# EAGLE board Croduino Basic v1.2 (EAGLE 7.3.0)
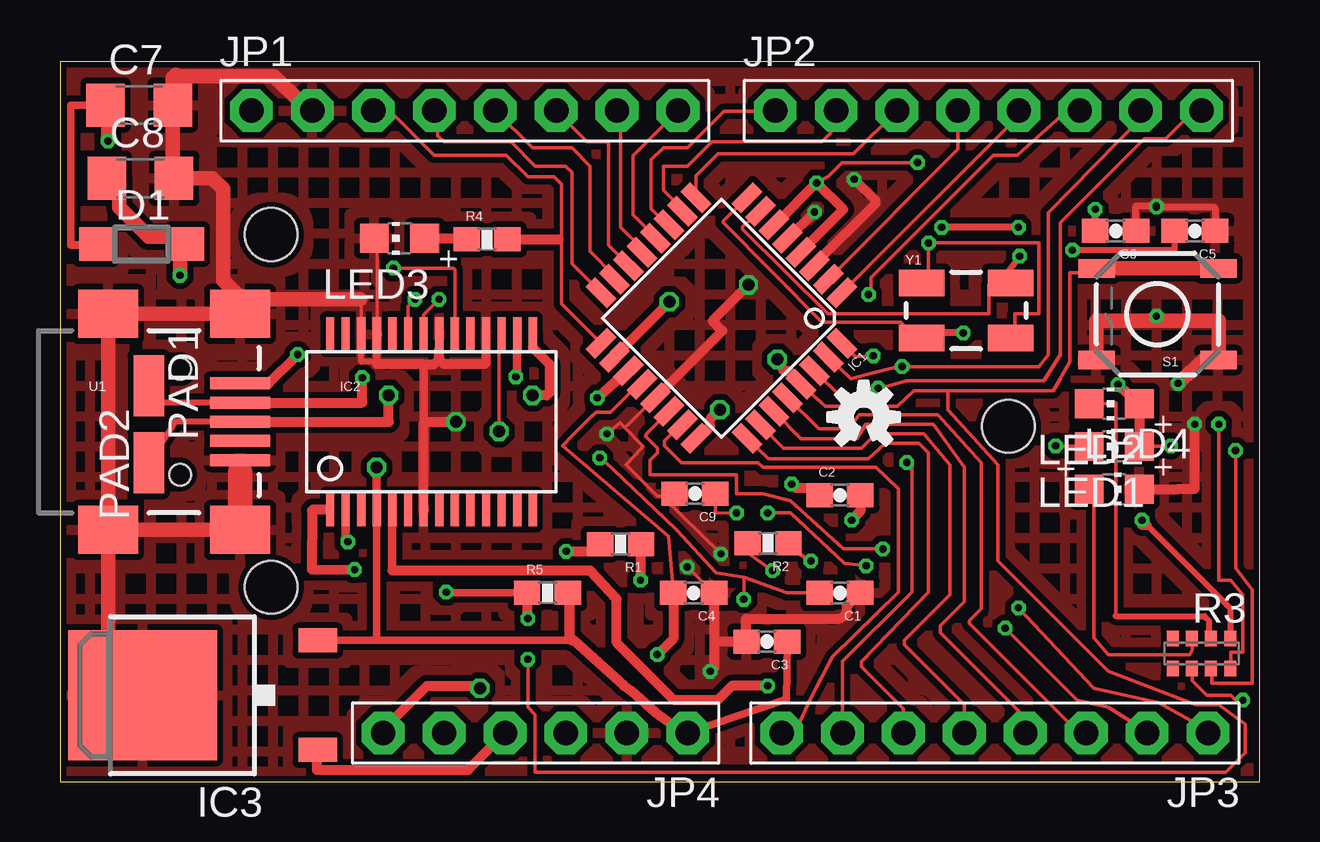
[diagram p0: board, top side]
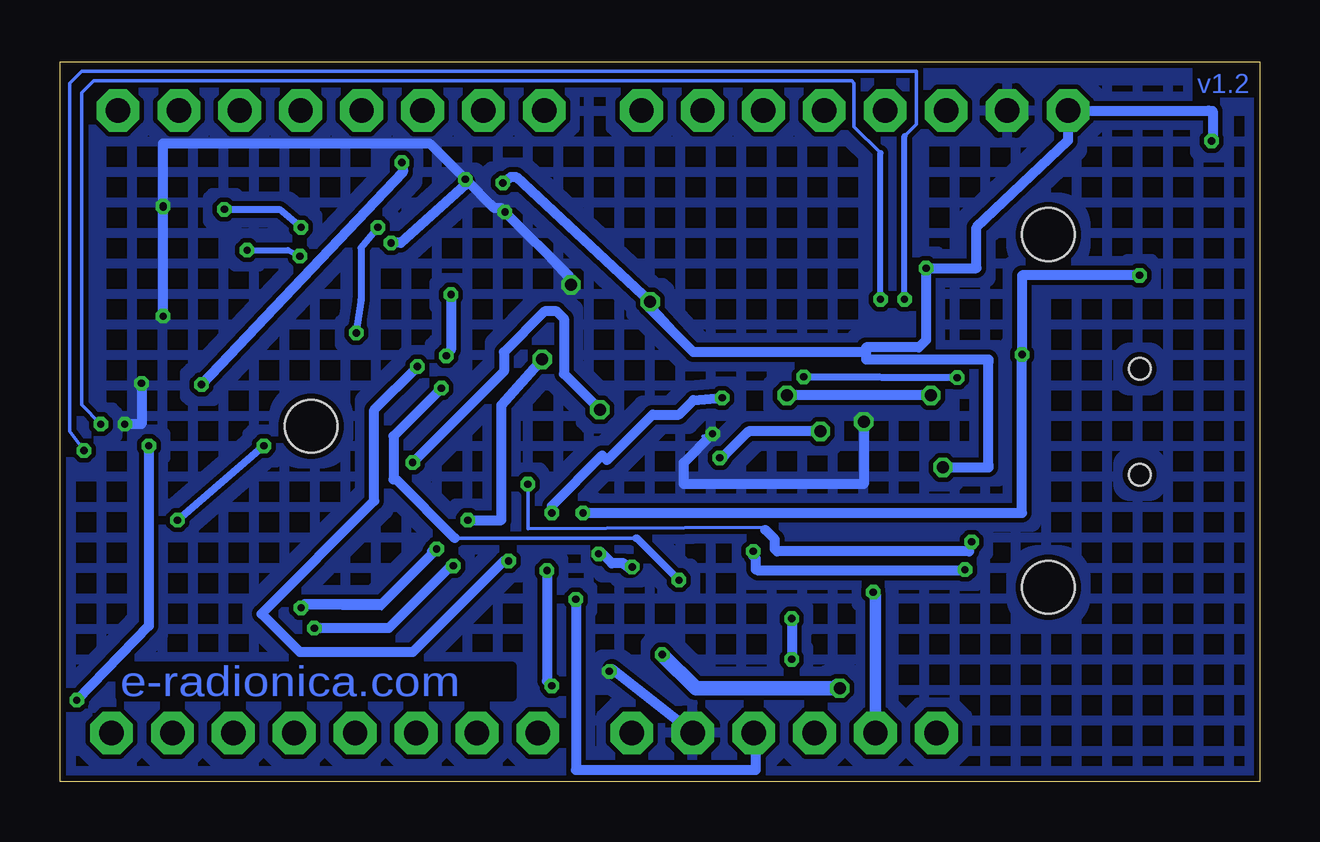
[diagram p1: board, bottom side, seen from below]

Size 50 x 30 mm. Coordinates in mm from the lower left corner, seen from the top.
Outline: 0,0 50,0 50,30 0,30 0,0
Copper layers (1*16): Top 0.035mm / dielectric 1.5mm / Bottom 0.035mm
Design rules "default": minimum track width 6mil, minimum drill 12mil, track to track 6mil, track to pad 6mil, pad to pad 6mil, via to via 6mil, smd to smd 0mil, copper to edge 10mil, drill to drill 10mil, minimum pad ring 10mil, minimum via ring 6mil, stop-mask expansion 2mil, vias tented up to drill 100mil, thermal gap 10mil
Holes 2.2 mm at 8.8,22.8 8.8,8.1 39.53,14.81

## Footprints (pad centres in the part's own frame; a part is rotated, then mirrored left to right if it is on the bottom)
0603-CAP = smd 1.1 x 1: 1 -0.85,0; 2 0.85,0
C3216 = smd 1.6 x 1.8: 1 -1.4,0; 2 1.4,0
SOD123 = smd 1.4 x 1.4: A 1.9,0; C -1.9,0
TQFP32-08 = smd 1.27 x 0.559: 1 -4.293,2.8; 2 -4.293,2; 3 -4.293,1.2; 4 -4.293,0.4; 5 -4.293,-0.4; 6 -4.293,-1.2; 7 -4.293,-2; 8 -4.293,-2.8; 17 4.293,-2.8; 18 4.293,-2; 19 4.293,-1.2; 20 4.293,-0.4; 21 4.293,0.4; 22 4.293,1.2; 23 4.293,2; 24 4.293,2.8 | smd 0.559 x 1.27: 9 -2.8,-4.293; 10 -2,-4.293; 11 -1.2,-4.293; 12 -0.4,-4.293; 13 0.4,-4.293; 14 1.2,-4.293; 15 2,-4.293; 16 2.8,-4.293; 25 2.8,4.293; 26 2,4.293; 27 1.2,4.293; 28 0.4,4.293; 29 -0.4,4.293; 30 -1.2,4.293; 31 -2,4.293; 32 -2.8,4.293
SSOP28DB = smd 0.348 x 1.397: 1 -4.225,-3.656; 2 -3.575,-3.656; 3 -2.925,-3.656; 4 -2.275,-3.656; 5 -1.625,-3.656; 6 -0.975,-3.656; 7 -0.325,-3.656; 8 0.325,-3.656; 9 0.975,-3.656; 10 1.625,-3.656; 11 2.275,-3.656; 12 2.925,-3.656; 13 3.575,-3.656; 14 4.225,-3.656; 15 4.225,3.656; 16 3.575,3.656; 17 2.925,3.656; 18 2.275,3.656; 19 1.625,3.656; 20 0.975,3.656; 21 0.325,3.656; 22 -0.325,3.656; 23 -0.975,3.656; 24 -1.625,3.656; 25 -2.275,3.656; 26 -2.925,3.656; 27 -3.575,3.656; 28 -4.225,3.656
TO252 = smd 1 x 1.6: 1 -2.28,-4.8; 2 2.28,-4.8 | smd 5.4 x 6.2: 3 0,2.5
1X08-BIG = drill 1.016 pad 1.778 octagon: 1 -8.89,0; 2 -6.35,0; 3 -3.81,0; 4 -1.27,0; 5 1.27,0; 6 3.81,0; 7 6.35,0; 8 8.89,0
1X06-BIG = drill 1.016 pad 1.778 octagon: 1 -6.35,0; 2 -3.81,0; 3 -1.27,0; 4 1.27,0; 5 3.81,0; 6 6.35,0
CHIP-LED0805 = smd 1.2 x 1.2: A 0,-1.05; C 0,1.05
SMD1,27-2,54 = smd 1.27 x 2.54: 1 0,0
0603-RES = smd 1.1 x 1: 1 -0.85,0; 2 0.85,0
0603-ARV = smd 0.5 x 0.65: 1 -1.2,-0.625; 2 -0.4,-0.625; 3 0.4,-0.625; 4 1.2,-0.625; 5 1.2,0.625; 6 0.4,0.625; 7 -0.4,0.625; 8 -1.2,0.625
TACTILE_SWITCH_SMD = smd 1.524 x 0.762: 1 -2.54,1.905; 2 2.54,1.905; 3 -2.54,-1.905; 4 2.54,-1.905
USB-MINIB = smd 2.5 x 0.5: D+ 2.5,0; D- 2.5,0.8; GND 2.5,-1.6; ID 2.5,-0.8; VBUS 2.5,1.6 | smd 2.5 x 2: MTN1 -3,4.5; MTN2 2.5,4.5; MTN3 -3,-4.5; MTN4 2.5,-4.5 | hole 0.9: 0,2.2; 0,-2.2
CRYSTAL-SMD-5X3 = smd 1.9 x 1.1: 1 -1.85,-1.15; 2 1.85,-1.15; 3 1.85,1.15; 4 -1.85,1.15

## Placement (x,y rotation side)
C1  0.1uF  [0603-CAP]  32.51,7.87 180 top
C2  0.1uF  [0603-CAP]  32.51,11.94 0 top
C3  0.1uF  [0603-CAP]  29.46,5.84 180 top
C4  0.1uF  [0603-CAP]  26.42,7.87 180 top
C5  22pF  [0603-CAP]  47.3,22.95 180 top
C6  22pF  [0603-CAP]  44,22.95 180 top
C7  10uF  [C3216]  3.3,28.19 0 top
C8  10uF  [C3216]  3.36,25.15 0 top
C9  0.1uF  [0603-CAP]  26.46,12.01 180 top
D1  MBR0520LT  [SOD123]  3.4,22.4 0 top
IC1  ATMEGA328  [TQFP32-08]  27.57,19.32 225 top
IC2  FT232RL  [SSOP28DB]  15.48,15 0 top
IC3  5v regulator  [TO252]  5.94,3.61 90 top
JP1  [1X08-BIG]  16.87,27.97 0 top
JP2  [1X08-BIG]  38.7,27.97 0 top
JP3  [1X08-BIG]  38.97,2.03 180 top
JP4  [1X06-BIG]  19.82,2.03 180 top
LED1  bijela  [CHIP-LED0805]  43.94,13.97 90 top
LED2  crvena  [CHIP-LED0805]  43.94,15.75 90 top
LED3  orange  [CHIP-LED0805]  14.15,22.64 90 top
LED4  plava  [CHIP-LED0805]  43.94,12.19 270 top
PAD1  [SMD1,27-2,54]  3.7,16.5 180 top
PAD2  [SMD1,27-2,54]  3.7,13.3 0 top
R1  1k  [0603-RES]  23.37,9.91 180 top
R2  1k  [0603-RES]  29.52,9.94 180 top
R3  [0603-ARV]  47.58,5.35 180 top
R4  680  [0603-RES]  17.8,22.6 0 top
R5  10k  [0603-RES]  20.32,7.87 0 top
S1  RESET  [TACTILE_SWITCH_SMD]  45.75,19.48 180 top
U1  USB-MINIB  [USB-MINIB]  5,15 0 top
U$1  [CRODUINO_BASIC2]  34.47,5.19 0 top
U$2  [MADE-IN-CROATIA]  9,5.9 0 top
U$4  [UTICNICA3MM]  46.7,10.4 0 top
U$5  OSHW-LOGOS  [OSHW-LOGO-S]  33.5,15.2 0 top
Y1  16MHz  [CRYSTAL-SMD-5X3]  37.77,19.63 0 top

## Library data of the parts
C1-C6 C9 IC1 IC2 R1-R5 S1 U1 U$5 Y1 = SparkFun
C7 C8 = rcl
D1 = diode
IC3 JP1-JP4 LED1-LED4 = adafruit
PAD1 PAD2 = wirepad
U$1 = untitled
U$2 U$4 = ERADIONICA

## Nets
3.3V: C1.2 IC2.17 JP4.3
+5V: C3.1 C7.1 D1.C IC1.4 IC1.6 IC1.18 IC2.4 IC2.20 IC3.2 JP1.1 JP4.1 LED1.A LED2.A R3.6 R5.2
A0: IC1.23 JP3.8
A1: IC1.24 JP3.7
A2: IC1.25 JP3.6
A3: IC1.26 JP3.5
A4: IC1.27 JP3.4
A5: IC1.28 JP3.3
A6: IC1.19 JP3.2
A7: IC1.22 JP3.1
AREF: C4.2 IC1.20 JP4.6
CRYSTAL1: C5.2 IC1.7 Y1.3
CRYSTAL2: C6.2 IC1.8 Y1.1
D0/RX: IC1.30 JP2.8 R1.1
D1/TX: IC1.31 JP2.7 R2.1
D2: IC1.32 JP2.6
D3: IC1.1 JP2.5
D4: IC1.2 JP2.4
D5: IC1.9 JP2.3
D6: IC1.10 JP2.2
D7: IC1.11 JP2.1
D8: IC1.12 JP1.8
D9: IC1.13 JP1.7
D10: IC1.14 JP1.6
D11: IC1.15 JP1.5
D12: IC1.16 JP1.4
D13: IC1.17 JP1.3 R4.2
GND: C1.1 C3.2 C4.1 C5.1 C6.1 C7.2 C8.2 C9.2 IC1.3 IC1.5 IC1.21 IC2.7 IC2.18 IC2.21 IC2.25 IC2.26 IC3.3 JP1.2 JP4.2 LED3.C LED4.C S1.1 S1.2 U1.GND U1.MTN1 U1.MTN2 U1.MTN3 U1.MTN4
N$1: LED1.C R3.1
N$2: LED2.C R3.2
N$3: C2.1 IC2.2
N$4: LED3.A R4.1
N$7: LED4.A R3.3
RESET: C2.2 IC1.29 JP4.5 R5.1 S1.3 S1.4
RX: IC2.1 R1.2
RXLED: IC2.22 R3.8
TX: IC2.5 R2.2
TXLED: IC2.23 R3.7
USB5V: C8.1 C9.1 D1.A U1.VBUS
USBDM: IC2.16 PAD1.1 U1.D-
USBDP: IC2.15 PAD2.1 U1.D+
VIN: IC3.1 JP4.4

## Tracks (layer width: path | path; a pad name or v marks a point on that pad's centre or on a via)
3.3V  (via drill 0.3, 0.5)
  Top 0.156: C1.2 31.53,7.87 30.3,7.87 28.5,8.53 | v22.5,13.5 22.98,13.09 23.03,13.04 25.7,10.5 27.35,8.7 28.5,8.53 | v18.3,14.6 18.3,18.55 IC2.17 | 28.5,8.53 v28.5,7.6
  Bottom 0.156: v22.5,13.5 20.9,14.7 18.4,14.7 v18.3,14.6 | 28.5,0.5 28.5,0.4 21,0.4 21,0.5 21,1.94 JP4.3
  Bottom 0.406: v28.5,7.6 28.5,0.5 21,0.5 21,1.7 21.2,1.9 | v18.3,14.6 21.3,14.6 22.3,13.6
+5V  (via drill 0.3, 0.5)
  Top 0.156: D1.C 0.41,22.5 0.45,22.35 | 1.27,28.19 C7.1 2,28.1 | IC3.2 13.19,5.89 13.2,6 | IC1.6 29.8,23.2 | v31.54,24.95 32,25.2 32.6,25.8 v35.75,25.8 | 44.9,15.84 LED2.A | IC2.20 16.46,21.34 16.4,21.4 v13.9,21.4 | IC1.18 23.2,17.8 | 13.2,11.2 IC2.4 | LED1.A 46.27,13.97 v46.3,14 | v49.3,3.4 49,3.4 48.8,3.6 47.8,3.6 47.2,4.2 47.2,4.7 R3.6
  Top 0.305: 0.76,22.35 0.45,22.35 0.45,28.19 1.27,28.19 | IC3.2 21.29,5.89 | 21.29,5.89 21.3,5.9 21.3,7.9 21.2,8 | R5.2 21.17,6 21.29,5.89 | C3.1 30.28,3.44 JP4.1 | 13.2,6 13.2,11.2 13.2,11.25 IC2.4
  Top 0.35: 13.2,11.2 v13.2,13.1
  Top 0.406: 44.9,15.84 v44.1,16.55 | LED2.A LED1.A | 23.2,17.8 v25.4,20 | IC1.4 30.89,22.09 32.65,23.85 v31.54,24.95 29.8,23.2 | 21.3,5.9 21.4,5.9 23.5,4 23.8,3.8 24.8,2.9 25.9,2.1 26,2.1 26.07,2.03 JP4.1
  Top 0.61: 2,28.1 v2,26.7
  Bottom 0.156: 7.98,26.72 8,26.7 | v31.54,24.95 31.6,25 31.19,25.3 v25.4,20 23.5,17.9 16.6,17.9 16.4,17.9 | 16.4,17.9 16.4,18.04 16.16,18.1 14.2,18.1 | 13.9,21.3 v13.9,21.4 | 16.4,17.9 16.4,17.6 16.4,17.5 11.3,17.5 | 11.3,13.2 13.1,13.1 v13.2,13.1
  Bottom 0.406: 11.3,13.2 11.3,17.5 | 13.9,21.3 13.9,18.4 14.2,18.1 16.4,18.1 16.4,17.6 11.3,17.6 | 16.6,17.9 23.6,17.9 25.5,19.8 | 31.6,25 31.52,24.98 31.2,25.2 31,25.2 v25.4,20 | v13.9,21.4 11.8,21.4 11.8,23.1 8,26.7 | 7.98,26.72 JP1.1 2.13,27.97 1.95,27.94 1.95,26.8 v2,26.7 | v35.75,25.8 35.7,25.4 v44.1,16.55 | v46.3,14 46.3,6.5 v49.3,3.4
A0
  Top 0.156: JP3.8 30.63,2.03 31.3,3.5 32.2,5.2 34.95,7.9 34.95,12.2 34,13.1 29.3,13.1 29.1,13.3 25.9,13.3 25.2,14 25.2,14.2 25.87,14.87 IC1.23
A1  (via drill 0.3, 0.5)
  Top 0.156: JP3.7 32.62,5.02 35.5,7.9 35.5,13.1 v35.3,13.3 | IC1.24 26.52,14.32
  Top 0.406: 26.52,14.32 26.62,14.32 27.1,14.8 27.1,15.1 v27.5,15.5
  Bottom 0.406: v27.5,15.5 29,17 29,19.3 29.3,19.6 29.8,19.6 31.5,17.9 31.5,17.1 v35.3,13.3
A2
  Top 0.156: JP3.6 35.16,3.04 33.4,4.8 33.4,5 36.2,7.9 36.2,13.7 35.8,14.1 34.4,14.1 33.7,13.45 29.53,13.45 IC1.25
A3
  Top 0.156: JP3.5 37.7,3.2 35.2,5.7 35.2,5.9 37.1,7.8 37.1,13.2 36,14.5 34,14.5 33.4,13.9 30.16,13.9 IC1.26
A4
  Top 0.156: JP3.4 40.24,2.66 36.7,6.2 36.7,6.5 37.7,7.5 37.7,13.1 36.4,14.9 33.6,14.9 33.2,14.3 30.89,14.3 IC1.27
A5
  Top 0.156: JP3.3 42.47,2.03 37.9,6.6 37.9,6.7 38.4,7.2 38.4,13.3 36.6,15.3 33.3,15.3 32.9,14.7 31.63,14.7 IC1.28
A6  (via drill 0.3)
  Top 0.156: JP3.2 45.32,2.08 43.7,3.1 42.4,3.4 v39.4,6.4 | v33.6,9 32.7,9.1 30.45,11.2 v29.5,11.2 | v22.4,16 22.66,16.1
  Top 0.406: IC1.19 23.63,17.13 v22.4,16
  Bottom 0.156: v39.4,6.4 36.4,6.4 v33.6,9
  Bottom 0.406: v33.6,9 33.7,9 36.3,6.4 v39.4,6.4 | v29.5,11.2 29.5,11.5 27.4,13.6 27.2,13.4 25.3,15.3 24.2,15.3 23.6,15.9 v22.4,16
A7  (via drill 0.3)
  Top 0.156: JP3.1 47.86,2.14 45.8,3.3 43.1,3.9 v39.95,7.25 | v34.3,9.7 32.65,9.7 30.45,11.7 29.3,12 28.2,12 28.2,12.8 24.6,12.8 24.6,13.4 24.9,13.7 24.9,13.9 24.4,14.4 24.45,14.5 IC1.22
  Bottom 0.156: v39.95,7.25 36.6,7.2 v34.3,9.7
AREF  (via drill 0.3, 0.5)
  Top 0.154: IC1.20 24.12,16.57 22.95,15.4 22.35,15.4 22.2,15.25 22.2,15.26 21.39,14.45
  Top 0.156: C4.2 25.37,10.23 20.95,14 21.39,14.45 | v17.5,3.9 15.34,3.9 JP4.6
  Top 0.406: 13.5,2 13.5,2.2 15.3,4 17.4,4 | 17.4,4 v17.5,3.9 17.5,4 17.4,4 | C4.2 25.57,5.97 v24.9,5.3
  Bottom 0.156: v24.9,5.3 24.8,5.3 23.4,3.9 17.6,3.9 v17.5,3.9
  Bottom 0.61: 17.6,4 17.6,3.9 23.5,3.9 v24.9,5.3
CRYSTAL1  (via drill 0.3)
  Top 0.156: Y1.3 38.72,20.72 38.72,19.81 38.72,19.5 32,19.5 28.45,23.01 28.45,23.12 IC1.7
  Top 0.25: C5.2 46.45,22.15 v42.2,22.15 | v40,21.9 39.3,20.95 39.45,20.95 39.6,20.8 | 39.6,20.75 39.6,20.8 | Y1.3 39.6,20.8
  Bottom 0.25: v42.2,22.15 40.5,22.15 v40,21.9
CRYSTAL2  (via drill 0.3)
  Top 0.156: Y1.1 35.62,18.48 35.05,19.15 31.75,19.15 27.63,23.31 27.66,23.37 IC1.8
  Top 0.3: C6.2 v43.15,23.85 | v39.95,23.1 v36.75,23.1 | v37.65,18.7 36.14,18.7 Y1.1
  Bottom 0.3: v43.15,23.85 40.85,23.85 v39.95,23.1 | v36.75,23.1 37.45,22.25 37.45,20.1 37.65,18.75 v37.65,18.7
D0/RX  (via drill 0.3)
  Top 0.156: JP2.8 47.27,27.97 46.1,26.8 45.2,26.8 41.7,23.3 41.7,17.8 41,16.7 35.3,16.7 34.55,16.5 v34.1,16.4 32.59,16 IC1.30 | 24.22,8.42 v24.2,8.4
  Top 0.406: 24.22,8.42 24.22,9.82 24.3,9.9 R1.1 | 24.2,9.9 R1.1 | R1.1
  Bottom 0.156: 26,10.15 33.55,10.15
  Bottom 0.305: 26,10.15 25.95,10.15 v24.2,8.4
  Bottom 0.406: v24.2,8.4 24.25,8.4 | v34.1,16.4 36.1,14.4 36.1,12.6 36,12.6 33.55,10.15
D1/TX  (via drill 0.3)
  Top 0.156: JP2.7 45.05,27.65 41.2,23.7 41.2,17.8 40.8,17.3 v35.1,17.3 34.9,17.3 33.9,17.05 32.97,16.8 IC1.31 | R2.1 30.8,9.5 v31.3,9.2
  Bottom 0.406: v31.3,9.2 31.5,9.2 35.3,5.4 40,5.4 41.6,7 36.9,11.7 36.9,15.5 v35.1,17.3
D2  (via drill 0.3)
  Top 0.156: 33.7,20.35 v33.7,20.3 33.8,20.4 33.8,21 38.9,26.1 39.9,26.1 41.97,27.97 JP2.6 | v33.9,17.75 33.15,17.7 IC1.32
  Bottom 0.156: v33.7,20.3 33.7,20.2 33.7,18.2 v33.9,17.75
  Bottom 0.406: 33.7,20.2 33.7,18 33.9,17.8
D3
  Top 0.156: JP2.5 39.97,27.75 IC1.1
D4
  Top 0.156: JP2.4 37.43,26.35 IC1.2
D5
  Top 0.156: IC1.9 26.52,25.25 27.43,26.16 33.08,26.16 JP2.3
D6
  Top 0.156: IC1.10 25.95,23.83 25.15,24.64 25.15,25.65 26.16,25.65 27.18,26.67 31.75,26.67 32.51,27.43 32.51,27.8 JP2.2
D7
  Top 0.156: IC1.11 25.31,23.2 24.64,23.88 24.64,25.91 25.15,26.42 26.16,26.42 27.69,27.94 29.78,27.94 JP2.1
D8
  Top 0.156: IC1.12 24.82,22.68 23.88,23.62 23.88,26.08 JP1.8
D9
  Top 0.156: IC1.13 24.25,22.23 23.37,23.11 23.37,27.82 JP1.7
D10
  Top 0.156: IC1.14 23.69,21.52 22.86,22.35 22.86,26.67 21.98,26.67 JP1.6
D11
  Top 0.156: IC1.15 23.12,21.07 22.1,22.1 22.1,25.65 21.34,26.42 19.69,26.42 JP1.5
D12
  Top 0.156: IC1.16 21.34,21.59 21.34,25.4 21.08,25.65 19.81,25.65 18.8,26.67 16,26.67 15.75,26.92 15.75,27.82 JP1.4
D13
  Top 0.154: 20.8,22.6 20.85,22.6 20.9,22.65
  Top 0.156: JP1.3 13.73,27.97 15.6,26.1 18.6,26.1 19.5,25.2 20.6,25.2 20.9,24.9 20.9,22.65 20.9,19.92 IC1.17
  Top 0.406: R4.2 20.8,22.6
GND  (via drill 0.3, 0.5)
  Top 0.154: 24.7,16 24.7,15.9 23.55,14.75 | 7.5,12.9 U1.GND
  Top 0.156: 6.7,19.7 6.9,19.5 U1.MTN2 7.85,19.85 8.1,20.1 | IC2.25 13.21,22.54 LED3.C | 15.7,17.5 15.8,17.6 | 15.8,18.65 IC2.21 15.81,17.71 | 17.8,18.61 IC2.18 | C3.2 | 33.36,7.8 C1.1 | 24.7,16 IC1.21 24.82,16.02 | 25.1,11.9 24.9,11.9 23.6,13.2 24.23,13.9 24.31,13.99 23.55,14.75 23.35,14.95 v22.8,14.5 | 25.1,11.9 25.51,11.9 C9.2 | IC2.26 12.56,20.04 12.5,20.1 | C4.1 27.23,7.87 v26.15,8.95 | v27.55,9.5 25.1,11.9 | IC1.3 31.46,21.56 | v31.45,23.74 31.29,23.6 | S1.2 43.2,19.3 45.6,19.3 v45.7,19.4
  Top 0.254: IC2.25 13.2,17.5 12.56,17.5 IC2.26
  Top 0.3: C6.1 44.85,24 v45.7,24 | v45.7,23.95 48.1,23.95 48.15,23.9 C5.1
  Top 0.305: 4.7,25.4 C8.2 | 4.7,29.34 4.83,29.46 | 13.2,17.5 13.2,18.65
  Top 0.35: IC2.7 15.16,17.34
  Top 0.36: IC2.18 17.76,17.46
  Top 0.406: 6.8,19.5 U1.MTN2 7.4,19.6 | U1.MTN3 2,5.3 2,5.05 IC3.3 | v28.7,20.7 27.2,19.2 27.6,18.8 27.6,18.78 IC1.21 | 31.46,21.56 34,24.1 34,24.2 v33.1,25.1 | IC1.5 v31.45,23.74 | C4.1 27.27,6 | 27.27,6 27.27,4.77 v27.1,4.6 | 27.27,6 27.42,5.84 C3.2 28.6,6.8 32.5,6.8 32.8,7 32.8,7.31 C1.1 | 15.16,17.34 15.1,17.4 | 15.1,17.4 15.6,17.4 15.7,17.5 | 15.1,17.4 13.2,17.4 13.2,17.5 | 13.2,18.65 IC2.25 | 15.81,17.71 15.8,17.7 15.8,17.6 16,17.4 17.7,17.4 17.76,17.46 | IC2.7 15.16,14.96 15.2,15 v16.5,15 | LED4.C 46.61,12.19 | 46.61,12.19 47.29,12.19 47.3,12.2 v47.3,14.9 | 46.61,12.19 46.6,12.2
  Top 0.61: 6.8,19.4 6.8,19.5 | 1.6,10 2,10 2,5.3 | 4.7,25.4 C7.2 4.7,29.34 | C8.2 6.35,25.15 6.8,24.7 6.8,20.9 7.85,19.85 | 8.1,20.1 12.5,20.1 | U1.MTN4 7.4,10.4 7.3,10.5 U1.MTN3 U1.MTN1 6.5,19.5 6.7,19.7 | S1.2 43.2,19.2 48.3,19.2 48.3,17.59 S1.1 47.68,17.58 v46.6,16.6 | JP1.2 10.43,27.97 8.9,29.4 4.86,29.4 4.83,29.46
  Top 1.016: U1.MTN4 7.5,12.9
  Bottom 0.156: v27.1,4.6 26.4,4.3 JP4.2 | v26.15,8.95 26.3,9 v27.55,9.5 | 46.6,16.4 v46.6,16.6 | v33.1,25.1 v31.45,23.74 v28.7,20.7 | v22.8,14.5 23.2,14.4
  Bottom 0.406: 28.8,20.8 28.8,21.1 v31.45,23.74 | 31.6,23.9 31.9,23.9 v33.1,25.1 34.6,26.6 45.7,26.6 v45.7,24 v45.7,23.95 v45.7,19.4 | 46.6,16.4 46.6,14.9 v47.3,14.9 | v16.5,15 16.5,12.4 24,12.4 24,13.3 v22.8,14.5
  pour Bottom (isolate 0.2, hatched): 0,0 0,30 50,30 50,0
  pour Top (isolate 0.25, hatched): 0,0 0,30 50,30 50,0
N$1  (via drill 0.3)
  Top 0.156: LED1.C 41.53,13.97 v41.5,14 | v45.1,10.9 45.1,10.7 | 48.8,6 R3.1
  Top 0.254: 48.8,6 48.8,7.2 45.3,10.7
  Top 0.406: v45.1,10.9 45.3,10.7 45.1,10.7
  Bottom 0.156: v41.5,14 41.55,13.95
  Bottom 0.305: 41.55,13.95 v45.1,10.9
N$2
  Top 0.156: LED2.C 44,15.75 44,15.8 44,6.9 | 47.9,6.05 R3.2
  Top 0.254: 47.9,6.05 47.9,6.7 47.7,6.9 44,6.9
N$3  (via drill 0.3)
  Top 0.156: C2.1 31.64,12.24 | IC2.2
  Top 0.35: IC2.2 11.9,10.1
  Top 0.406: 11.9,10.1 v12,10 | 31.64,12.24 30.66,12.24 v30.5,12.4
  Bottom 0.156: v30.5,12.4 30.5,10.55 20.7,10.6 20.6,10.5 | 20.2,9.7 12,9.6 v12,10
  Bottom 0.406: 12.1,9.6 20.1,9.6 20.2,9.7 20.2,10.1 20.6,10.5
N$4
  Top 0.156: 16.9,22.6 R4.1 | R4.1 17,22.6 17,22.7 16.94,22.64 16.8,22.64 16.84,22.6 R4.1
  Top 0.406: LED3.A 16.91,22.64 R4.1
N$5
  Bottom 0.406: 16,7.8 16,2.1
N$6
  Bottom 0.406: 27,4.7 23.4,1.9
N$7
  Top 0.156: LED4.A 43.1,12.19 43.1,6 43.7,5.3 47.1,5.3 47.2,5.5 47.2,5.95 R3.3
N$8  (via drill 0.3)
  Top 0.156: 39.8,18.6 39.8,19.5 40.8,19.5 40.8,22.45 v36.2,22.45 36.2,20.85
N$9
  Top 0.406: 18.6,2.1 18.5,2.1
N$10
  Bottom 0.406: 33.1,25 33.1,24.9 35.8,22.45 36.15,22.45
N$11
  Bottom 0.406: 26.3,8.9 26.2,8.9 26.1,9 26.4,9 26.5,9.1 27,9.1 27.5,9.6 27.5,9.4
N$13
  Bottom 0.406: 13.1,13.1 11.3,13.1
N$14
  Bottom 0.406: 34.5,9.6 34.5,9.5 36.6,7.4 39.8,7.4 39.9,7.3
N$15
  Top 0.406: 15.8,17.8 15.8,18
RESET  (via drill 0.3, 0.5)
  Top 0.156: v29.9,17.6 29.96,17.5 | IC1.29 30.94,16.51 31.9,15.65 34.9,15.65 35.6,16.3 37,16.3 | 37,16.3 41.4,16.3 | 41.7,16.8 41.4,16.3 | 41.4,16.3 42.1,17.5 42.1,21.2 42.9,21.2 43.1,21.4 S1.4 | 43.3,21.4 S1.4 | S1.4 | v19.5,5.1 19.5,3.1 19.8,2.8 19.8,0.4 48.6,0.4 49.4,1.2 49.4,2.4 48.3,3.2 47.35,3.2 43.7,4.6 39.1,9.2 39.1,13.2 37,15.5 37,16.3
  Top 0.305: R5.1 16.13,7.87 v16.1,7.9
  Top 0.406: R5.1 19.47,6.83 v19.5,6.8 | C2.2 33.36,11.26 v33,10.9 | IC1.29 30.89,16.61 30.4,17.1 30.2,17.1 v29.9,17.6
  Top 0.61: S1.4 48.21,21.39 48.3,21.3 48.4,21.4 S1.3
  Bottom 0.305: v16.1,7.9 16.1,2.12 JP4.5
  Bottom 0.406: v19.5,6.8 v19.5,5.1 | v33,10.9 31.6,10.9 31.6,15.7 v29.9,17.6
RX  (via drill 0.3)
  Top 0.156: IC2.1 11.2,11.34 | 22.52,10 R1.2
  Top 0.406: v21.1,9.6 22.21,9.6 R1.2 | 11.2,11.34 10.54,11.34 10.5,11.3 10.49,8.85 v12.28,8.84
  Bottom 0.156: v12.28,8.84 21,8.85 v21.1,9.6
  Bottom 0.406: 12.5,8.8 20.9,8.8 21,8.85 21,9.3 21.1,9.4
RXLED  (via drill 0.3)
  Top 0.156: IC2.22 15.16,19.46 v15.8,20.1 | v48.3,14.9 48.3,8.4 48.8,8.4 49.3,7.8 49.3,5.4 48.8,5.4 48.8,4.75 R3.8
  Bottom 0.156: 15.8,26.2 16.9,27.3 16.9,29.1 17,29.2 48.6,29.2 49.1,28.7 49.1,15.7 v48.3,14.9
  Bottom 0.254: v15.8,20.1 15.8,26.2
TX  (via drill 0.3)
  Top 0.156: R2.2 28.67,9.53 v29.7,8.8
  Top 0.35: 13.85,8.8 13.85,11.25 IC2.5
  Top 0.406: v29.5,4 28,4 27.4,3.4 25.6,3.4 23.2,5.8 23.2,7.6 22.1,8.8 13.85,8.8
  Bottom 0.406: v29.7,8.8 29.7,4.2 v29.5,4
TXLED  (via drill 0.3)
  Top 0.156: IC2.23 14.51,19.81 v14.8,20.1 | v49,13.8 49,8.9 49.7,8 49.7,4.1 48,4.1 48,4.6 47.9,4.7 48,4.7 R3.7
  Bottom 0.156: 14.8,26.9 14.3,27.4 14.3,29.6 49.1,29.6 49.6,29.1 49.6,14.6 v49,13.8
  Bottom 0.254: v14.8,20.1 14.8,26.9
USB5V  (via drill 0.3)
  Top 0.156: U1.VBUS 8.7,16.6 | 5,22.2 D1.A | C9.1 27.31,11.19 v28.2,11.2
  Top 0.305: C8.1 2.46,25.15
  Top 0.406: 8.7,16.6 v9.9,17.8
  Top 0.61: 2.46,25.15 2.46,23.94 3.7,22.7 4.8,22.7 5.2,22.3 5.2,22.4 | 5.2,22.5 5.2,22.4 | 5.2,22.4 D1.A | D1.A 5.4,22.4 | D1.A | 5,22.2 v5,21.1
  Bottom 0.156: 9.9,17.6 v9.9,17.8
  Bottom 0.406: v5,21.1 9.9,21.1 v9.9,17.8 | v28.2,11.2 9.9,11.2 9.9,17.6
USBDM  (via drill 0.3)
  Top 0.156: 19.06,16.96 v19,16.87 | 7.6,15.8 U1.D-
  Top 0.254: U1.D- 3.5,15.8 PAD1.1
  Top 0.36: IC2.16 19.06,16.93
  Top 0.406: 7.6,15.8 12.6,15.8 v12.6,16.84 | 19.06,16.93 v19,16.87
  Bottom 0.305: v19,16.87 v12.6,16.84
USBDP  (via drill 0.5)
  Top 0.156: v19.71,16.11 v19.7,16.1
  Top 0.254: U1.D+ 4.8,15 PAD2.1
  Top 0.36: IC2.15 19.71,18.09
  Top 0.406: U1.D+ 13.7,15 v13.7,16.1 | 19.71,18.09 20.4,17.4 20.4,16.2 20.3,16.1 v19.7,16.1
  Bottom 0.156: v19.7,16.1 19.6,16.1 | 13.8,16.1 v13.7,16.1
  Bottom 0.406: 13.8,16.1 19.6,16.1
VIN
  Top 0.406: JP4.4 17.02,0.5 10.7,0.5 10.69,1.24 IC3.1

## Text on the board
Bottom: v1.2 | e-radionica.com
bStop: e-radionica.com
200bmp: 13 | 12 | 11' | 10' | 9' | 8 | 7 | 6' | 5' | 4 | 3' | 2 | 1 | 0 | +5V | gnd | digital | digital | tx | rx | 16MHz | RESET | ATMEGA328 | FT232RL | v1.2 / SEP 2014 | analog | aref | rst | VIN | 3V3 | gnd | +5V | 0 | 1 | 2 | 3 | 4 | 5 | 6 | 7 | /Users/David/pcb.bmp
206bmp: e-radionica.com